# EAGLE board atto84 (EAGLE 7.7.0)
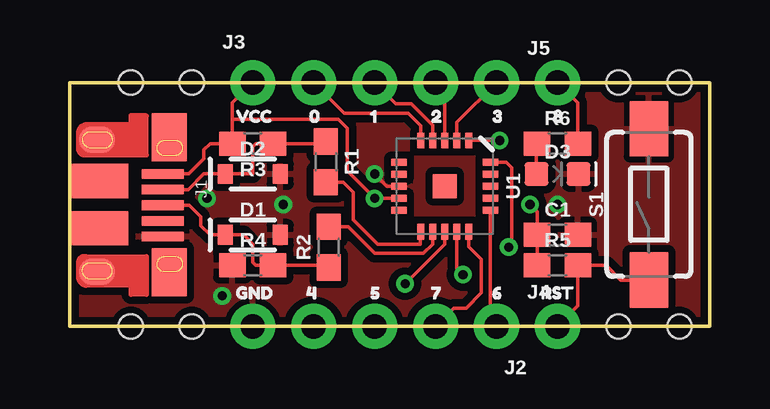
[diagram p0: board, top side]
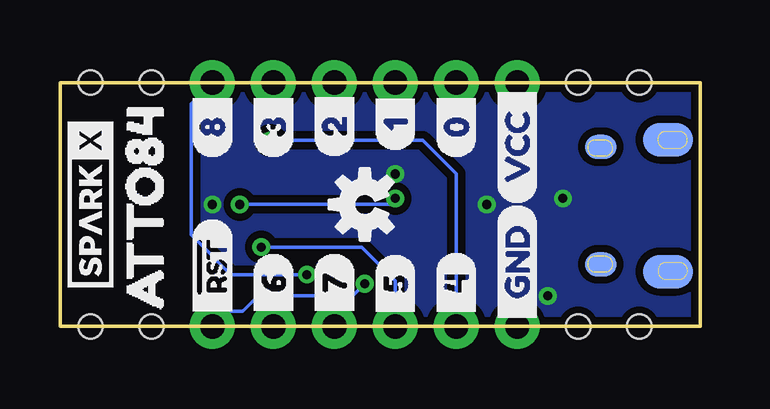
[diagram p1: board, bottom side, seen from below]

Size 26.67 x 10.16 mm. Coordinates in mm from the lower left corner, seen from the top.
Outline: 0,0 0,10.16 26.67,10.16 26.67,0 0,0
Copper layers (1*16): Top 0.035mm / dielectric 1.5mm / Bottom 0.035mm
Design rules "SparkFun-2-layer-PCBWay-LIMIT": minimum track width 6mil, minimum drill 0.3mm, track to track 6mil, track to pad 6mil, pad to pad 6mil, via to via 6mil, smd to smd 6mil, copper to edge 6mil, drill to drill 6mil, minimum pad ring 7mil, minimum via ring 7mil, stop-mask expansion 4mil, vias tented up to drill 25mil, thermal gap 10mil
Holes 1.02 mm at 5.08,10.16 2.54,10.16 2.54,0 5.08,0 22.86,0 25.4,0 25.4,10.16 22.86,10.16

## Footprints (pad centres in the part's own frame; a part is rotated, then mirrored left to right if it is on the bottom)
0603 = smd 1.1 x 1: 1 -0.85,0; 2 0.85,0
SOD-323 = smd 0.63 x 0.83: A 1.15,0; C -1.15,0
LED-0603 = smd 1 x 1: A -0.877,0; C 0.877,0
USB-MICROB-PTH-MILL = smd 0.4 x 1.75: D+ 0.031,1.331; D- -0.619,1.331; GND 1.331,1.331; ID 0.681,1.331; VBUS -1.269,1.331 | smd 2 x 1.46: SHIELD -2.794,1.606; SHIELD2 2.831,1.606 | smd 1.425 x 2.5: SHIELD3 -0.979,-1.349; SHIELD4 0.996,-1.352 | smd 1.4 x 2.1 bottom: SHIELD5 -2.7,-1.2; SHIELD7 2.8,-1.2 | smd 1.1 x 1.5: SHIELD6 2.8,-1.4; SHIELD8 -2.7,-1.4 | smd 1 x 1.3 bottom: SHIELD9 -2.4,1.6; SHIELD10 2.5,1.6
1X05_NO_SILK = drill 1.016 pad 1.88: 1 0,0; 2 2.54,0; 3 5.08,0; 4 7.62,0; 5 10.16,0
1X01_NO_SILK = drill 1.016 pad 1.88: 1 0,0
TACTILE_SWITCH_SMD_6.0X3.5MM = smd 2.3 x 1.6: 1 -3.15,0; 2 3.15,0
QFN20 = smd 1 x 1: 0 0,0 | smd 0.65 x 0.3: 1 -1.9,1; 2 -1.9,0.5; 3 -1.9,0; 4 -1.9,-0.5; 5 -1.9,-1; 11 1.9,-1; 12 1.9,-0.5; 13 1.9,0; 14 1.9,0.5; 15 1.9,1 | smd 0.3 x 0.65: 6 -1,-1.9; 7 -0.5,-1.9; 8 0,-1.9; 9 0.5,-1.9; 10 1,-1.9; 16 1,1.9; 17 0.5,1.9; 18 0,1.9; 19 -0.5,1.9; 20 -1,1.9

## Placement (x,y rotation side)
C1  0.1uF  [0603]  20.32,3.81 0 top
D1  3.6V  [SOD-323]  7.62,3.81 0 top
D2  3.6V  [SOD-323]  7.62,6.35 0 top
D3  BLUE  [LED-0603]  20.32,6.35 0 top
FRAME1  FRAME-LETTER  [CREATIVE_COMMONS]  -19.05,-11.43 0 top  (outside the outline)
J1  [USB-MICROB-PTH-MILL]  2.54,5.08 270 top
J2  [1X05_NO_SILK]  17.78,0 180 top
J3  [1X05_NO_SILK]  7.62,10.16 0 top
J4  [1X01_NO_SILK]  20.32,0 0 top
J5  [1X01_NO_SILK]  20.32,10.16 0 top
R1  68OHM-0603-1/10W-1%  [0603]  10.67,6.86 270 top
R2  68OHM-0603-1/10W-1%  [0603]  10.79,3.3 90 top
R3  1.5k  [0603]  7.62,7.62 180 top
R4  1M  [0603]  7.62,2.54 0 top
R5  10k  [0603]  20.32,2.54 0 top
R6  1k  [0603]  20.32,7.62 0 top
S1  MOMENTARY-SWITCH-SPST-SMD-6.0X3.5MM  [TACTILE_SWITCH_SMD_6.0X3.5MM]  24.13,5.08 90 top
U1  ATTINY84ATTINY84-20MU  [QFN20]  15.62,5.84 270 top
U$1  [00]  9.53,8.76 0 top
U$2  [11]  12.06,8.76 0 top
U$3  [22]  14.61,8.76 0 top
U$4  [33]  17.14,8.76 0 top
U$5  [44]  9.4,1.4 0 top
U$6  [55]  12.06,1.4 0 top
U$7  [66]  17.14,1.4 0 top
U$8  [77]  14.61,1.4 0 top
U$9  [RST8]  19.18,1.4 0 top
U$10  [VCC10]  6.48,8.76 0 top
U$11  [GND9]  6.48,1.4 0 top
U$12  [81]  19.68,8.76 0 top
U$13  [ATTO8411]  23.15,-0.66 90 bottom
U$14  [SPARKX-SMALL]  25.4,5.08 90 bottom
U$15  [_#RST0]  20.32,0 90 bottom
U$16  [_42]  10.16,0.13 90 bottom
U$17  [_53]  12.7,0.13 90 bottom
U$18  [_64]  17.78,0.13 90 bottom
U$19  [_75]  15.24,0.13 90 bottom
U$20  [_GND1]  7.62,-0.13 90 bottom
U$21  [VCC_5]  7.62,5.08 90 bottom
U$22  [0_4]  10.16,6.99 90 bottom
U$23  [1_3]  12.7,7.24 90 bottom
U$24  [2_2]  15.24,6.99 90 bottom
U$25  [3_1]  17.78,6.99 90 bottom
U$26  [8_0]  20.32,6.99 90 bottom
U$27  [OSHW-LOGO-S]  13.97,5.08 90 bottom

## Library data of the parts
C1 = SparkFun-Capacitors; PROD_ID: CAP-00810
D1 D2 = SparkFun-DiscreteSemi; PROD_ID: DIO-08199
D3 = SparkFun-LED; PROD_ID: DIO-08575
FRAME1 U$27 = SparkFun-Aesthetics
J1 = SparkFun-Connectors; PROD_ID: CONN-13711
J2-J5 = SparkFun-Connectors
R1 R2 = SparkFun-Resistors
R3 = SparkFun-Resistors; PROD_ID: RES-08306
R4 = SparkFun-Resistors; PROD_ID: RES-07868
R5 = SparkFun-Resistors; PROD_ID: RES-00824
R6 = SparkFun-Resistors; PROD_ID: RES-07856
S1 = SparkFun-Switches; PROD_ID: SWCH-00815; SF_SKU: COM-08229
U1 = SparkFun-IC-Microcontroller
U$1-U$11 U$13 = buzzard_labels (20)
U$12 = buzzard_labels (21)
U$14 = SparkX
U$15-U$20 = buzzard_labels (23)
U$21-U$26 = buzzard_labels (22)

## Nets
!RESET: J4.1 R5.2 S1.1 U1.13
D0: J3.2 U1.5
D1: J3.3 U1.4
D2: J3.4 U1.3
D3: J3.5 U1.2
D4: J2.4 U1.1
D5: J2.3 U1.20
D6: J2.1 U1.16
D7: J2.2 U1.15
D+: D1.C J1.D+ R2.1 R4.2
D-: D2.C J1.D- R1.1 R3.1
GND: C1.2 D1.A D2.A D3.C J1.GND J2.5 R4.1 S1.2 U1.8
N$3: D3.A R6.1
PB0: R1.2 U1.11
PB1: R2.2 U1.12
STATUS: J5.1 R6.2 U1.14
VCC: C1.1 J1.VBUS J3.1 R3.2 R5.1 U1.9

## Tracks (layer width: path | path; a pad name or v marks a point on that pad's centre or on a via)
!RESET  (via drill 0.38)
  Top 0.152: S1.1 22.96,1.93 22.35,2.54 R5.2 21.17,0.85 J4.1 | U1.13 15.62,3.43 v13.97,1.78
  Bottom 0.152: v13.97,1.78 14.48,1.27 18.41,1.27 19.05,0.64 19.68,0.64 J4.1
D0
  Top 0.152: U1.5 14.62,8.37 14.1,8.89 11.43,8.89 J3.2
D1
  Top 0.152: J3.3 13.59,9.27 14.22,9.27 15.11,8.38 U1.4
D2
  Top 0.152: U1.3 15.62,9.78 J3.4
D3
  Top 0.152: U1.2 16.12,8.5 J3.5
D4  (via drill 0.38)
  Top 0.152: v17.91,7.75 U1.1
  Bottom 0.152: v17.91,7.75 11.56,7.75 10.16,6.35 J2.4
D5  (via drill 0.38)
  Top 0.152: U1.20 18.18,6.84 18.41,6.6 18.41,3.43 v18.29,3.3
  Bottom 0.152: v18.29,3.3 14.1,3.3 12.7,1.91 J2.3
D6
  Top 0.152: U1.16 17.52,0.26 J2.1
D7
  Top 0.152: U1.15 16.62,3.32 17.14,2.79 17.14,1.4 16.51,0.76 16,0.76 J2.2
D+
  Top 0.152: J1.D+ 4.98,5.05 5.46,4.57 5.46,4.19 5.84,3.81 D1.C 7.24,3.81 7.62,3.43 7.62,2.67 7.75,2.54 R4.2 10.71,2.54 R2.1
D-
  Top 0.152: J1.D- 4.94,5.7 5.59,6.35 D2.C 7.62,6.35 7.62,7.49 7.75,7.62 R3.1 10.58,7.62 R1.1
GND  (via drill 0.38)
  Top 0.152: U1.8 13.21,5.84 v12.7,6.35
  other vias: 8.89,5.08 6.35,1.27 5.71,5.33 20.32,5.08
  pour Bottom (isolate 0.305): 0,10.16 26.67,10.16 26.67,0 0,0
  pour Top (isolate 0.305): 0,10.16 26.67,10.16 26.67,0 0,0
N$3
  Top 0.152: D3.A 19.44,7.59 R6.1
PB0
  Top 0.152: R1.2 11.39,6.01 11.81,5.59 11.81,4.45 12.83,3.43 14.61,3.43 14.61,3.93 U1.11
PB1
  Top 0.152: R2.2 11.6,4.15 12.7,3.05 14.73,3.05 15.11,3.43 U1.12
STATUS  (via drill 0.38)
  Top 0.152: R6.2 21.17,9.31 J5.1 | U1.14 16.12,2.42 v16.38,2.16
  Bottom 0.152: J5.1 21.21,9.27 21.21,3.81 19.56,2.16 v16.38,2.16
VCC  (via drill 0.38)
  Top 0.152: R5.1 C1.1 19.47,4.79 v19.18,5.08 | J1.VBUS 4.95,6.35 5.59,6.99 5.59,7.37 5.84,7.62 R3.2 6.77,8.64 | 6.77,8.64 6.77,9.31 J3.1 | U1.9 v12.7,5.33 11.56,6.48 11.56,8.26 11.18,8.64 6.77,8.64
  Bottom 0.152: v19.18,5.08 12.95,5.08 v12.7,5.33

## Text on the board
tDocu: N.Poole